# EAGLE board board_v1 (EAGLE 8.7.0)
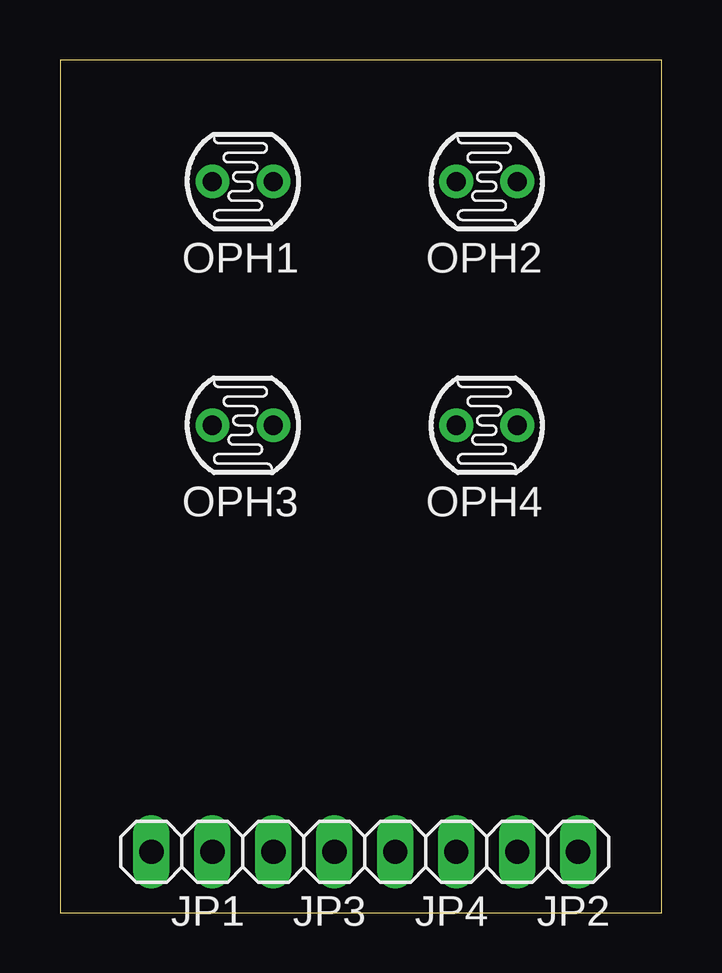
[diagram p0: board, top side]
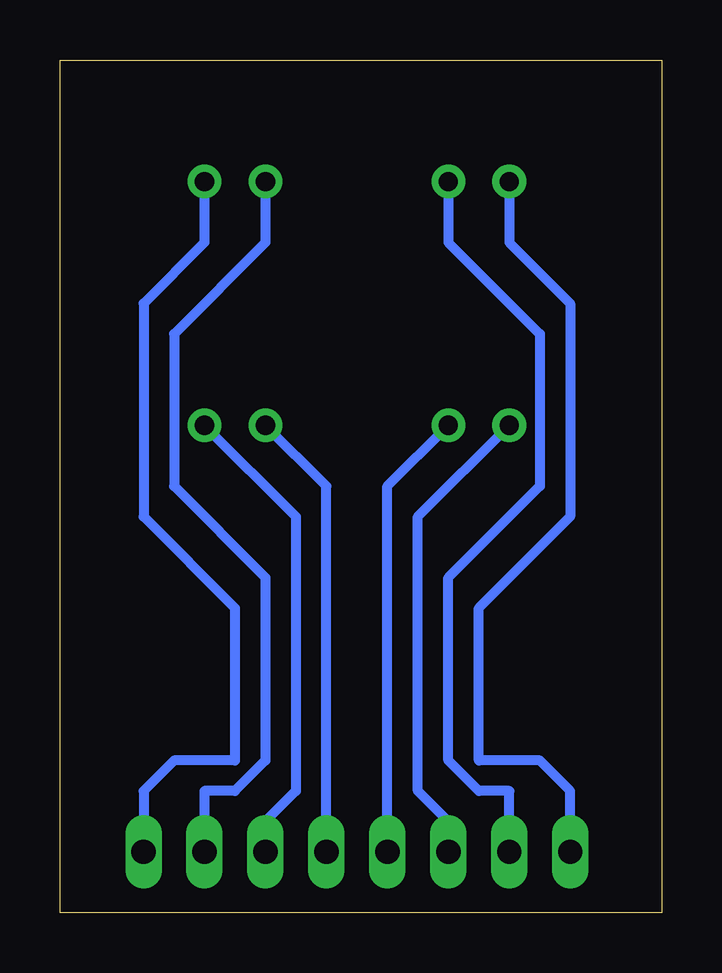
[diagram p1: board, bottom side, seen from below]

Size 25.07 x 35.55 mm. Coordinates in mm from the lower left corner, seen from the top.
Outline: 0,0 25.07,0 25.07,35.55 0,35.55 0,0
Copper layers (1*16): Top 0.035mm / dielectric 1.5mm / Bottom 0.035mm
Design rules "default": minimum track width 6mil, minimum drill 0.35mm, track to track 6mil, track to pad 6mil, pad to pad 6mil, via to via 6mil, smd to smd 6mil, copper to edge 40mil, drill to drill 6mil, minimum pad ring 10mil, minimum via ring 8mil, stop-mask expansion 4mil, vias tented up to drill 0mil, thermal gap 10mil

## Footprints (pad centres in the part's own frame; a part is rotated, then mirrored left to right if it is on the bottom)
1X02 = drill 1.016 long: 1 -1.27,0; 2 1.27,0
VT900 = drill 0.8 pad 1.4: 1 -1.27,0; 2 1.27,0

## Placement (x,y rotation side)
JP1  [1X02]  5.08,2.54 180 top
JP2  [1X02]  20.32,2.54 180 top
JP3  [1X02]  10.16,2.54 180 top
JP4  [1X02]  15.24,2.54 180 top
OPH1  VT90N1  [VT900]  7.62,30.48 0 top
OPH2  VT90N1  [VT900]  17.78,30.48 0 top
OPH3  VT90N1  [VT900]  7.62,20.32 0 top
OPH4  VT90N1  [VT900]  17.78,20.32 0 top

## Library data of the parts
JP1-JP4 = pinhead
OPH1-OPH4 = photo-elements

## Nets
N$1: JP1.2 OPH1.1
N$2: JP1.1 OPH1.2
N$3: JP2.2 OPH2.1
N$4: JP2.1 OPH2.2
N$5: JP3.2 OPH3.1
N$6: JP3.1 OPH3.2
N$7: JP4.2 OPH4.1
N$8: JP4.1 OPH4.2

## Tracks (layer width: path | path; a pad name or v marks a point on that pad's centre or on a via)
N$1
  Bottom 0.406: OPH1.1 6.35,27.94 3.81,25.4 3.81,16.51 7.62,12.7 7.62,6.35 5.08,6.35 3.81,5.08 JP1.2
N$2
  Bottom 0.406: OPH1.2 8.89,27.94 5.08,24.13 5.08,17.78 8.89,13.97 8.89,6.35 7.62,5.08 6.35,5.08 JP1.1
N$3
  Bottom 0.406: OPH2.1 16.51,27.94 20.32,24.13 20.32,17.78 16.51,13.97 16.51,6.35 17.78,5.08 19.05,5.08 JP2.2
N$4
  Bottom 0.406: OPH2.2 19.05,27.94 21.59,25.4 21.59,16.51 17.78,12.7 17.78,6.35 20.32,6.35 21.59,5.08 JP2.1
N$5
  Bottom 0.406: OPH3.1 10.16,16.51 10.16,5.08 8.89,3.81 JP3.2
N$6
  Bottom 0.406: OPH3.2 11.43,17.78 JP3.1
N$7
  Bottom 0.406: OPH4.1 13.97,17.78 JP4.2
N$8
  Bottom 0.406: OPH4.2 15.24,16.51 15.24,5.08 16.51,3.81 JP4.1